# EAGLE board MyoWare_Cable_Shield (EAGLE 7.5.0)
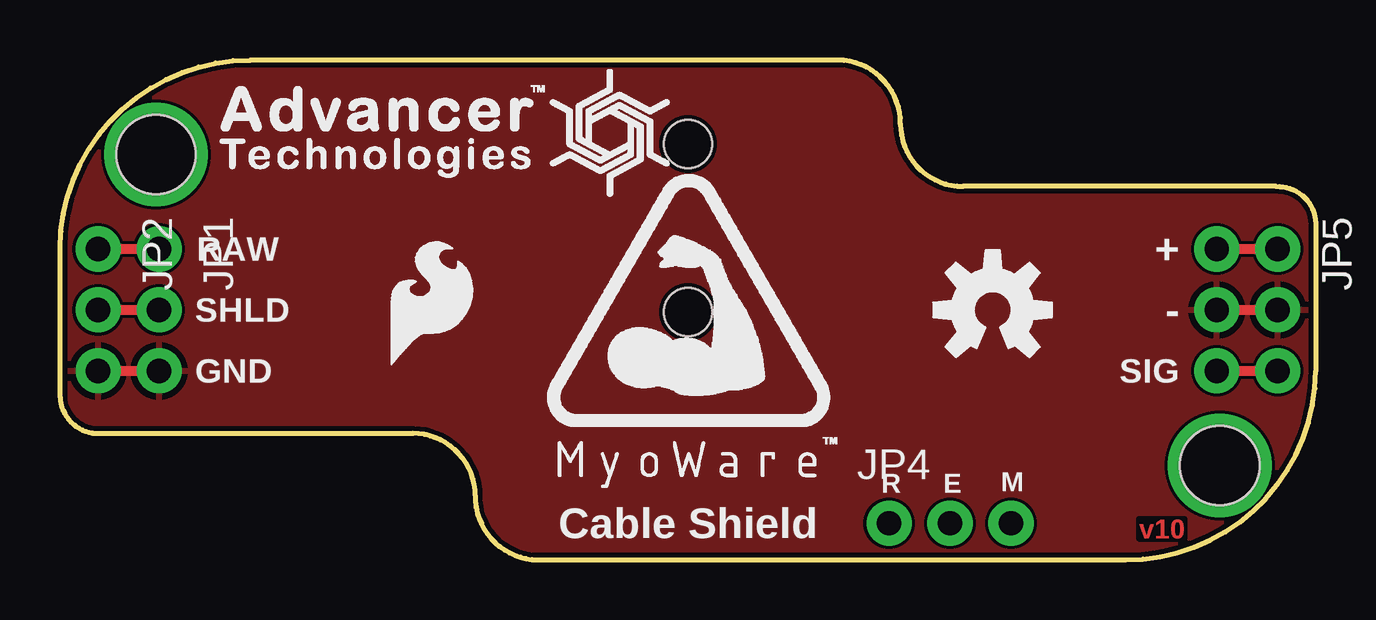
[diagram p0: board, top side]
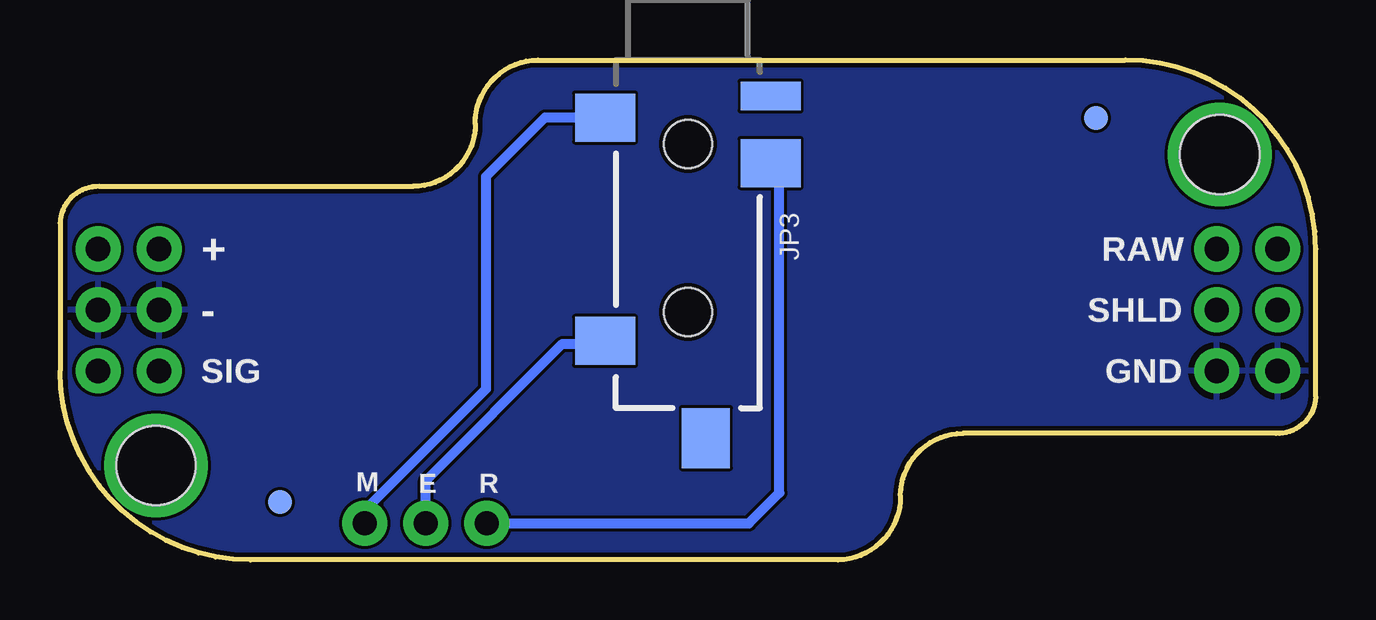
[diagram p1: board, bottom side, seen from below]

Size 52.32 x 20.83 mm. Coordinates in mm from the lower left corner, seen from the top.
Outline: 19.91,0 44.39,0 arc90 52.32,7.87 52.32,14.03 arc90 50.67,15.56 37.62,15.56 arc-90 35.02,18.16 arc90 32.42,20.83 7.94,20.83 arc90 0,12.95 0,6.79 arc90 1.65,5.27 14.7,5.27 arc-90 17.3,2.67 arc90 19.91,0
Copper layers (1*16): Top 0.035mm / dielectric 1.5mm / Bottom 0.035mm
Design rules "Gold_Phoenix_Standard_Spec_2_layer": minimum track width 5mil, minimum drill 6mil, track to track 5mil, track to pad 5mil, pad to pad 5mil, via to via 5mil, smd to smd 5mil, copper to edge 8mil, drill to drill 8mil, minimum pad ring 5mil, minimum via ring 5mil, stop-mask expansion 4mil, vias tented up to drill 20mil, thermal gap 10mil

## Footprints (pad centres in the part's own frame; a part is rotated, then mirrored left to right if it is on the bottom)
FIDUCIAL-1X2 = smd 1 x 1: 1 0,0
1X03_NO_SILK = drill 1.016 pad 1.88: 1 0,0; 2 2.54,0; 3 5.08,0
AUDIO-JACK-3.5MM-SMD = smd 2 x 2.5: RING 4.3,3.45; SLEEVE 2.4,-3.45; TIP 11.7,-3.45 | smd 1.2 x 2.5: RSH 1.5,3.45 | smd 2.5 x 2: TSH 15.75,0.75 | hole 2: 3.5,0; 10.5,0
STAND-OFF = hole 3.302: 0,0

## Placement (x,y rotation side)
FID1  FIDUCIAL1X2  [FIDUCIAL-1X2]  43.16,2.41 0 bottom
FID2  FIDUCIAL1X2  [FIDUCIAL-1X2]  9.16,18.41 0 bottom
FRAME1  FRAME-LETTER  [CREATIVE_COMMONS]  -5.59,-14.99 0 top  (outside the outline)
JP1  Power  [1X03_NO_SILK]  4.13,12.95 270 top
JP2  Power  [1X03_NO_SILK]  1.59,12.95 270 top
JP3  3.5mm Jack  [AUDIO-JACK-3.5MM-SMD]  26.16,20.83 270 bottom
JP4  Power  [1X03_NO_SILK]  34.54,1.52 0 top
JP5  Power  [1X03_NO_SILK]  50.74,12.95 270 top
JP6  Power  [1X03_NO_SILK]  48.2,12.95 270 top
LOGO  [MYOWARE_LOGO]  26.16,9.53 0 top
LOGO1  SFE_LOGO_FLAME.2_INCH  [SFE_LOGO_FLAME_.2]  13.46,7.87 0 top
LOGO2  OSHW-LOGOM  [OSHW-LOGO-M]  38.86,10.41 0 top
SPIRAL  [SPIRAL_LOGO_60%]  22.95,17.79 0 top
STANDOFF1  STAND-OFF  [STAND-OFF]  4,16.89 0 top
STANDOFF2  STAND-OFF  [STAND-OFF]  48.32,3.94 0 top
U$6  [ADVANCER_LOGO]  13.07,17.64 0 top

## Library data of the parts
FID1 FID2 FRAME1 LOGO1 LOGO2 = SparkFun-Aesthetics
JP1 JP2 JP4-JP6 = SparkFun-Connectors
JP3 = SparkFun-Connectors; PROD_ID: CONN-10353
LOGO SPIRAL U$6 = advancer-technologies
STANDOFF1 STANDOFF2 = SparkFun-Electromechanical

## Nets
END: JP3.TIP JP4.2
GND: JP1.3 JP2.3 JP5.2 JP6.2
MID: JP3.SLEEVE JP4.3
RAW: JP1.1 JP2.1
SHIELD: JP1.2 JP2.2
SIG: JP5.3 JP6.3
VCC: JP5.1 JP6.1
VREF: JP3.RING JP4.1

## Tracks (layer width: path | path; a pad name or v marks a point on that pad's centre or on a via)
END
  Bottom 0.406: JP3.TIP 29.61,9 31.39,9 37.08,3.3 JP4.2
GND
  Top 0.406: JP6.2 JP5.2 | JP2.3 JP1.3
  pour Top: 0.13,0.06 52.2,0.06 52.2,20.76 0.13,20.76
  pour Bottom: 0.13,0.06 52.2,0.06 52.2,20.76 0.13,20.76
MID
  Bottom 0.406: JP3.SLEEVE 32.12,18.43 34.58,15.97 34.58,7.11 39.62,2.06 JP4.3
N$1  (via drill 3.3)
  other vias: 4,16.89
N$2  (via drill 3.3)
  other vias: 48.32,3.94
RAW
  Top 0.406: JP2.1 JP1.1
SHIELD
  Top 0.406: JP2.2 JP1.2
SIG
  Top 0.406: JP6.3 JP5.3
VCC
  Top 0.406: JP6.1 JP5.1
VREF
  Bottom 0.406: JP4.1 23.62,1.52 22.35,2.79 22.35,16.39 22.49,16.53 JP3.RING

## Text on the board
Top: v10
tPlace: RAW | + | SHLD | - | GND | SIG | R | E | M | Cable Shield
bPlace: RAW | + | SHLD | - | GND | SIG | R | E | M
Measures: All units in inches
tDocu: Brian E Kaminski of Advancer Technologies | Revised by: Brent Wilkins